# Altium PCB PulseInductionDriver.PcbDoc
Units mm, origin at the board's own origin, x right, y up, seen from the top; angles counter-clockwise.
Board outline 67.5 x 82.5 mm, 2 copper layers (Top Layer, Bottom Layer); 31 components, 19 nets, 72 pads, 0 vias.
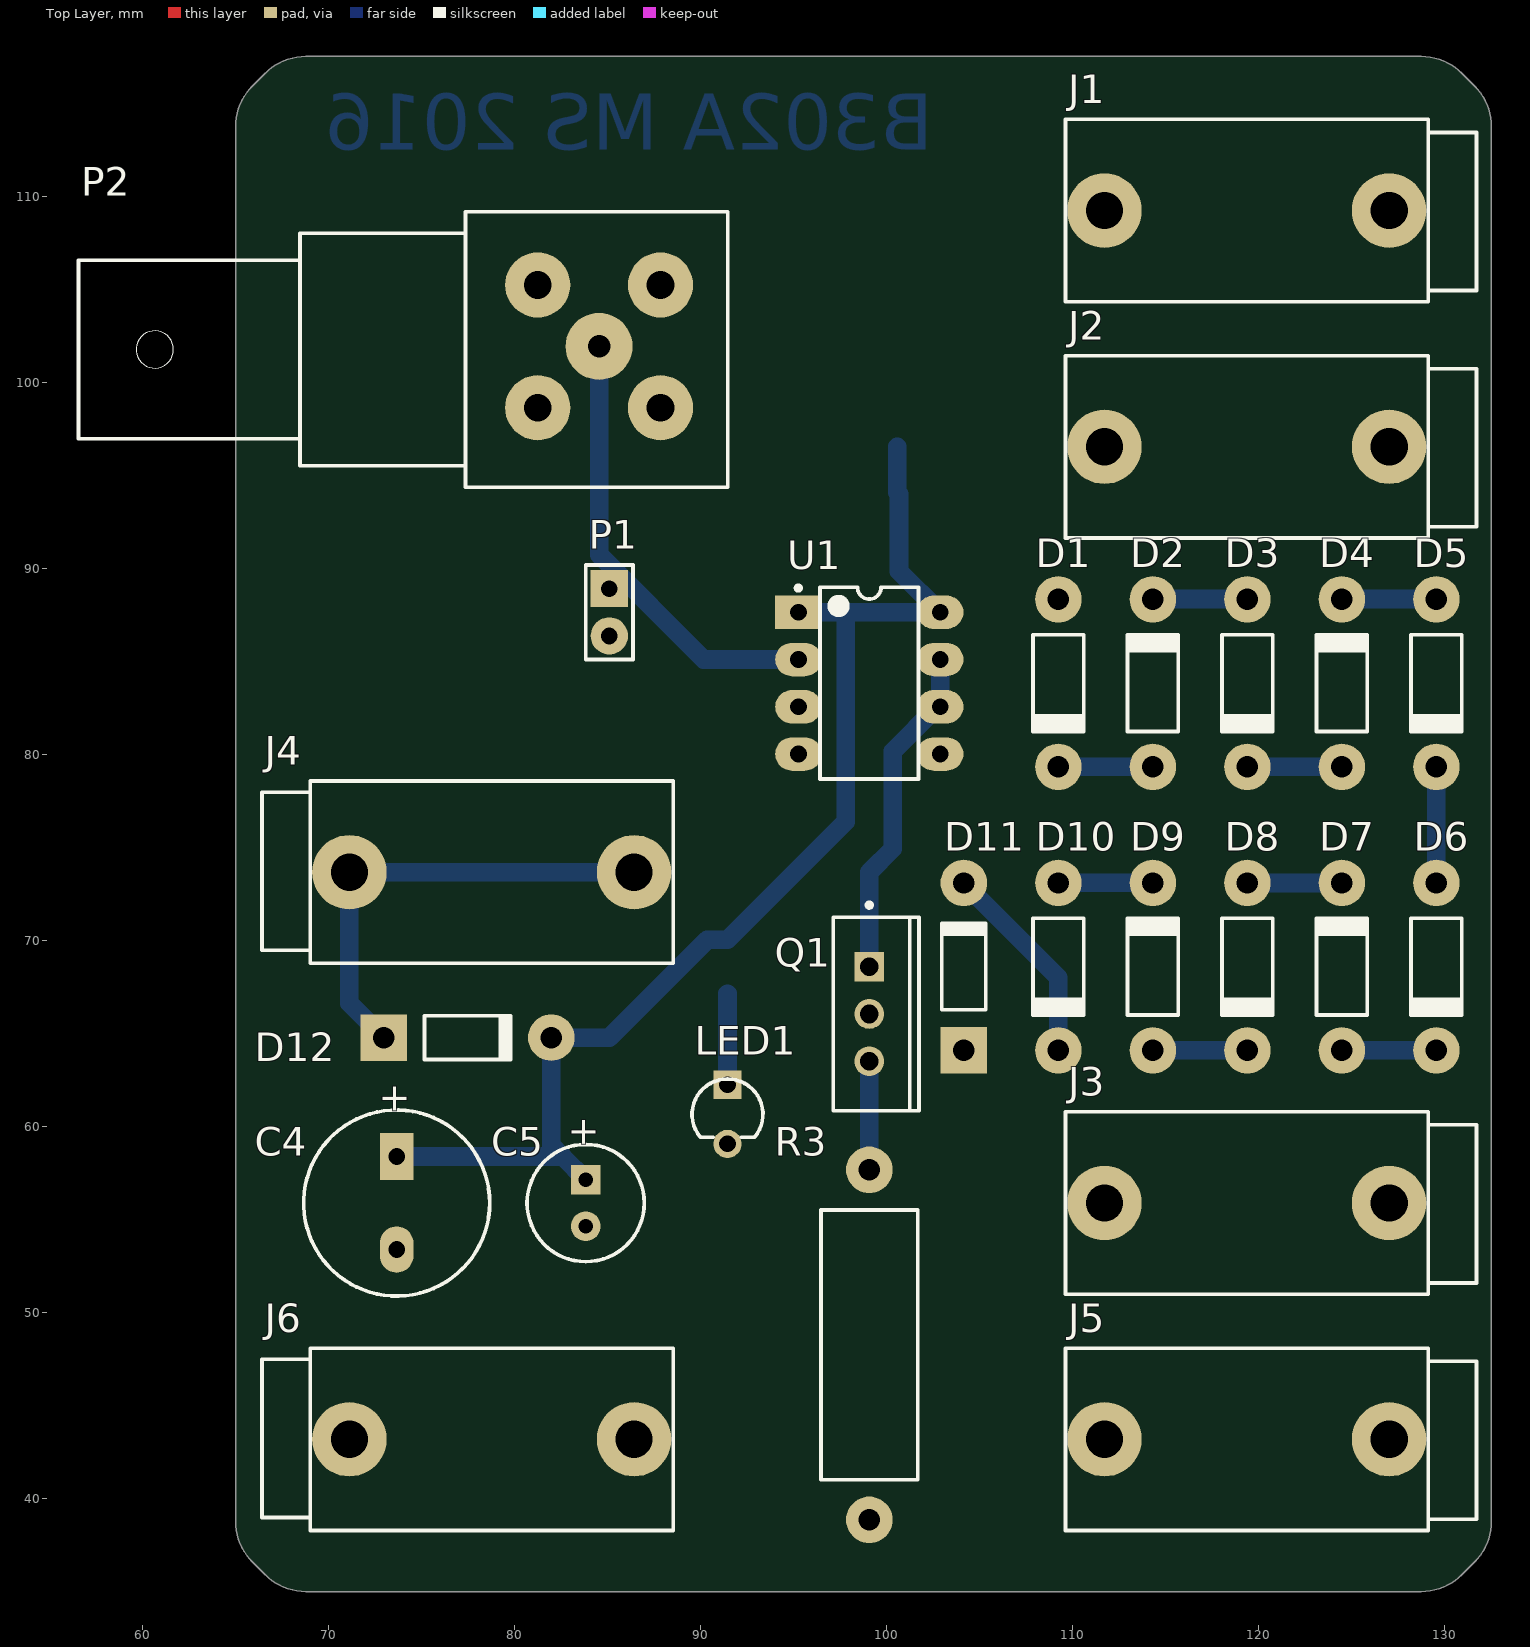
[diagram p0: Top Layer view]
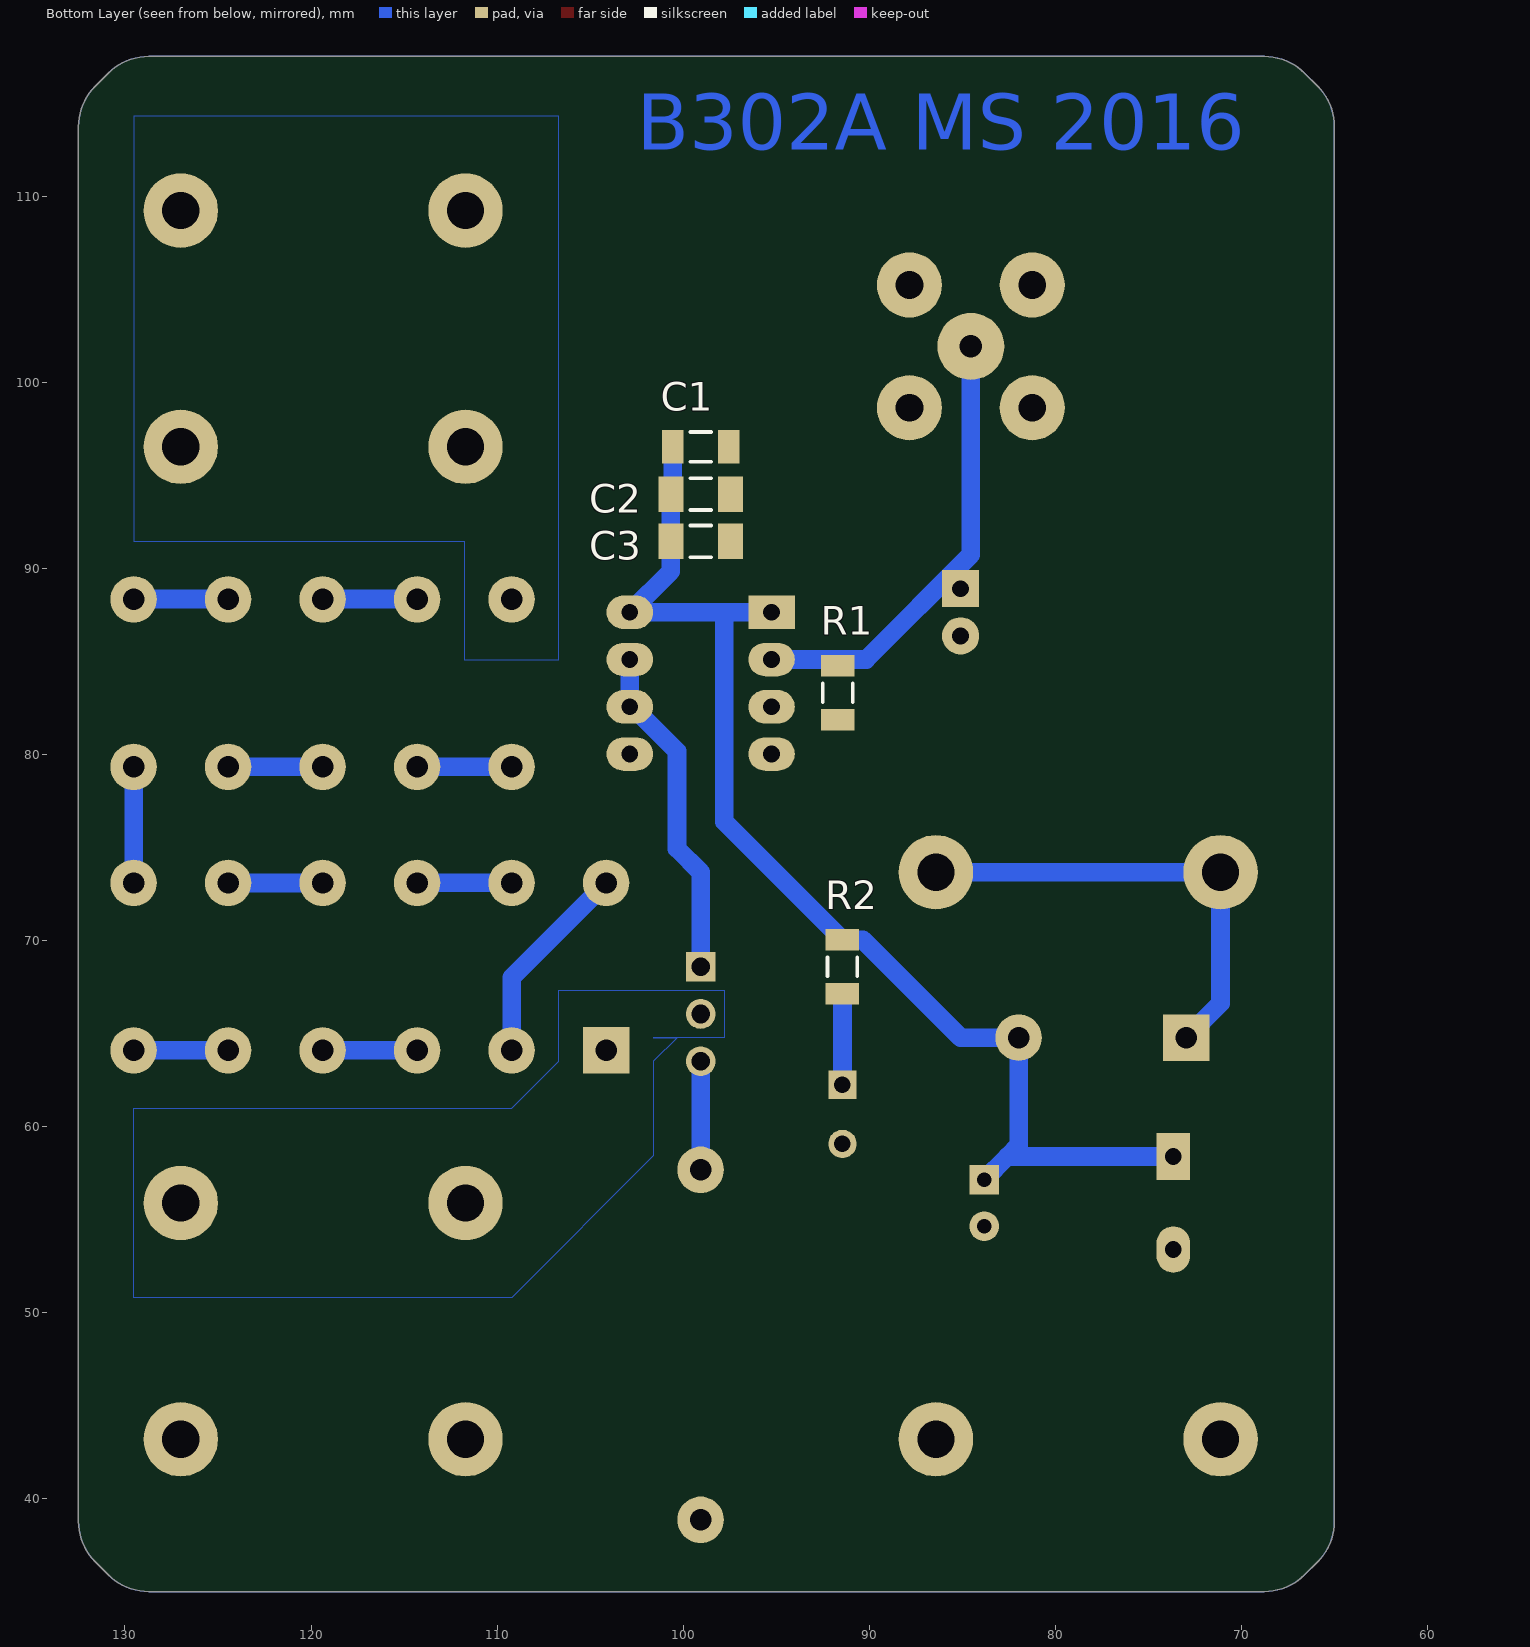
[diagram p1: Bottom Layer view, seen from below]

## Layer stack, top to bottom
Top Solder: solder mask 0.0102, Solder Resist, Dk 3.5
Top Layer: signal copper 0.0356
Dielectric 1: dielectric 0.32, FR-4, Dk 4.8
Bottom Layer: signal copper 0.0356
Bottom Solder: solder mask 0.0102, Solder Resist, Dk 3.5

## Board outline
65.898,36.602 cw(c68.066,38.77) 65,38.77 65,113.73 cw(c68.066,113.73) 65.898,115.898 66.602,116.602 cw(c68.77,114.434) 68.77,117.5 128.73,117.5 cw(c128.73,114.434) 130.898,116.602 131.602,115.898 cw(c129.434,113.73) 132.5,113.73 132.5,38.77 cw(c129.434,38.77) 131.602,36.602 130.898,35.898 cw(c128.73,38.066) 128.73,35 68.77,35 cw(c68.77,38.066) 66.602,35.898

## Design rules (kind name [scope] priority, off if disabled: settings)
Clearance "Mechanical Clearance" [InPoly vs OnLayer('Keep-Out Layer')] p1: gap=0.5
Clearance "Polygon Clearance" [InPolygon vs IsPad] p2: gap=0.3
Clearance [All] p3: gap=0.2
PolygonConnect [All] p1: connectstyle=Relief reliefconductorwidth=0.254 reliefentries=4 polygonreliefangle="90 Angle" airgapwidth=0.254
RoutingLayers [All] p1: top layer_v5=FALSE bottom layer_v5=TRUE
RoutingVias [All] p1: holewidth=0.711 width=1.27 viastyle="Through Hole" minholewidth=0.711 minwidth=1.27 maxholewidth=0.711 maxwidth=1.27
SolderMaskExpansion [All] p1: expansion=0.102
Width [All] p1: maxlimit=5 minlimit=0.5 preferedwidth=1 minimp=50.000000 maximp=50.000000 favimp=50.000000
29 further rules are at their usual default settings.

## Components (designator, comment, footprint, x,y, rotation, side; value= is the part's Value field where it differs from the comment)
C1 "4.7uF" CAPC1206(3216)190_N 99.06,96.52 r180 bottom
C2 "100nF" CAPC1206(3216)150_M 99.06,93.98 r180 bottom
C3 "100nF" CAPC1206(3216)150_M 99.06,91.44 r180 bottom
C4 "Cap Polarised" CAPPR5-10X12.5 73.66,55.88 r270 top
C5 "ECA-1HM470" PNSC-ECA-1HM470 83.82,55.88 r270 top
D1 "1N4732A" FAIR-DO-41-2_V 109.22,83.82 r270 top
D2 "1N4732A" FAIR-DO-41-2_V 114.3,83.82 r90 top
D3 "1N4732A" FAIR-DO-41-2_V 119.38,83.82 r270 top
D4 "1N4732A" FAIR-DO-41-2_V 124.46,83.82 r90 top
D5 "1N4732A" FAIR-DO-41-2_V 129.54,83.82 r270 top
D6 "1N4732A" FAIR-DO-41-2_V 129.54,68.58 r270 top
D7 "1N4732A" FAIR-DO-41-2_V 124.46,68.58 r90 top
D8 "1N4732A" FAIR-DO-41-2_V 119.38,68.58 r270 top
D9 "1N4732A" FAIR-DO-41-2_V 114.3,68.58 r90 top
D10 "1N4732A" FAIR-DO-41-2_V 109.22,68.58 r270 top
D11 "1N4002-T" DIOD-DO-41-P-2_V 104.14,68.58 r90 top
D12 "1N4002-T" DIOD-DO-41-P-2_V 77.47,64.77 r0 top
J1 "Red" "4mm socket right angled" 127,109.22 r0 top
J2 "Blue" "4mm socket right angled" 127,96.52 r0 top
J3 "Blue" "4mm socket right angled" 127,55.88 r0 top
J4 "Red" "4mm socket right angled" 71.12,73.66 r180 top
J5 "Black" "4mm socket right angled" 127,43.18 r0 top
J6 "Black" "4mm socket right angled" 71.12,43.18 r180 top
LED1 "LED_3mm" "LED-Polarized - 3mm" 91.44,62.23 r270 top
P1 "Header 2" HDR1X2 85.09,88.9 r270 top
P2 "PCB BNC" "PCB BNC RA Socket" 91.44,109.22 r0 top
Q1 "IPP110N20N3 G" INF-PG-TO220-3-1_A_V 99.06,66.04 r0 top
R1 "1K 5% 1206(3216)" RESC1206(3216)_N 91.694,83.312 r90 bottom
R2 "3K3 5% 1206(3216)" RESC1206(3216)_N 91.44,68.58 r90 bottom
R3 "13FR025E" OMTE-13FR025E 99.06,48.26 r90 top
U1 "TC4451VPA" PDIP300-PA8 99.06,83.82 r0 top

## Footprints (in the part's own frame and the unit in brackets; to place one, negate y for a bottom-side part, rotate by r counter-clockwise, add the part's x,y. Pads: shape width x height; smd on the part's side, far side on the other; paste and mask are expansions set on the pad)
"4mm socket right angled" [mm]
  round 4 hole 2: 1(-15.3,0) 1(0,0)
  silkscreen extent -17.4,-4.9 4.7,4.9
CAPC1206(3216)150_M [mm] "Chip Capacitor, Body 3.2x1.6mm, Height 1.5mm, IPC Low Density"
  rect 1.35x1.9 smd: 1(-1.6,0) 2(1.6,0)
  silkscreen extent -0.55,-0.85 0.55,0.85, body extent -1.7,-0.9 1.7,0.9, height 1.5
CAPC1206(3216)190_N [mm] "Chip Capacitor, Body 3.2x1.6mm, Height 1.9mm, IPC Medium Density"
  rect 1.15x1.8 smd: 1(-1.5,0) 2(1.5,0)
  silkscreen extent -0.55,-0.8 0.55,0.8, body extent -1.7,-0.9 1.7,0.9, height 1.9
CAPPR5-10X12.5 [mm] "Capacitor, Electrolytic, Radial; Body 10 x 12.5 mm (Dia.xH typ); Pin Spacing 5 mm (typ)"
  rect 2.5x1.8 hole 0.9: 1(-2.5,0)
  oval 2.5x1.8 hole 0.9: 2(2.5,0)
  silkscreen extent -5,-5 5,5
DIOD-DO-41-P-2_V [mm] "2-Leads, Axial Lead, Body 4.635x2.36mm, Pin Spacing 9mm"
  rect 2.5x2.5 hole 1.15: 1(-4.5,0)
  round 2.5 hole 1.15: 2(4.5,0)
  silkscreen extent -2.32,-1.18 2.32,1.18, body extent -4.93,-1.18 4.93,1.18, height 2.35
FAIR-DO-41-2_V [mm] "2-Leads, Axial leaded, Body 2.72x5.2mm, Pin Spacing 9mm"
  round 2.5 hole 1.15: 1(-4.5,0) 2(4.5,0)
  silkscreen extent -2.6,-1.36 2.6,1.36, body extent -4.93,-1.36 4.93,1.36, height 2.71
HDR1X2 [mm] "Connector; Header; 2 Position"
  rect 2x2 hole 0.9: 1(0,0)
  round 2 hole 0.9: 2(2.54,0)
  silkscreen extent -1.27,-1.27 3.81,1.27
INF-PG-TO220-3-1_A_V [mm] "FM, 3-Leads, Body 10.03x8.98mm, Pitch 2.54mm"
  rect 1.6x1.6 hole 1: 1(0,2.54)
  round 1.6 hole 1: 2(0,0) 3(0,-2.54)
  silkscreen extent -1.93,-5.2 2.67,5.97, body extent -1.93,-5.2 2.67,5.2, height 20.75
"LED-Polarized - 3mm" [mil]
  rect 60x60 hole 35: A(0,0)
  round 60 hole 35: K(125,0)
  silkscreen extent -12,-75 111,75
OMTE-13FR025E [mm]
  round 2.5 hole 1.15: 1(-9.405,0) 2(9.405,0)
  silkscreen extent -7.25,-2.6 7.25,2.6, body extent -7.25,-2.6 7.25,2.6, height 5.2
"PCB BNC RA Socket" [mm] "PCB BNC RA Socket"
  round 3.6 hole 1.2: 1(-6.9,-7.3)
  round 3.5 hole 1.5: 2(-10.2,-10.6) 2(-10.2,-4) 2(-3.6,-10.6) 2(-3.6,-4)
  silkscreen extent -34.88,-14.87 0.02,-0.07
PDIP300-PA8 [mm] "DIP, 8-Pin, Row Spacing 7.62 mm, Pitch 2.54 mm"
  rect 2.5x1.8 hole 0.9: 1(-3.81,3.81)
  oval 2.5x1.8 hole 0.9: 2(-3.81,1.27) 3(-3.81,-1.27) 4(-3.81,-3.81) 5(3.81,-3.81) 6(3.81,-1.27) 7(3.81,1.27) 8(3.81,3.81)
  silkscreen extent -3.93,-5.15 2.65,5.23, body extent -3.6,-5.15 3.6,5.15, height 5.33
PNSC-ECA-1HM470 [mm]
  rect 1.6x1.6 hole 0.8: 1(-1.25,0)
  round 1.6 hole 0.8: 2(1.25,0)
  silkscreen extent -3.15,-3.15 3.15,3.15, body extent -3.16,-3.16 3.16,3.16, height 12.2
RESC1206(3216)_N [mm] "Chip Resistor, Body 3.2x1.6mm, IPC Medium Density"
  rect 1.15x1.8 smd: 1(-1.45,0) 2(1.45,0)
  silkscreen extent -0.5,-0.8 0.5,0.8, body extent -1.67,-0.87 1.67,0.87, height 0.75

## Part data
C1: library part CMP-1037-04923-1, "CAP 4.7uF 50V ±10% 1206 (3216 Metric) Thickness 1.9mm SMD"
C2 C3: library part CMP-1037-04216-1, "CAP 100nF 100V ±20% 1206 (3216 Metric) Thickness 1.45mm SMD"
C5: library part CMP-1665-00013-1, "CAP ALUM 47UF 50V 20% RADIAL"
D1 D2 D3 D4 D5 D6 D7 D8 D9 D10: library part CMP-0892-00030-1, "Zener Diode, 4.7V, 1W, 5%, -65 to 200 degC, 2-Pin DO-41, Body 2.72 x 5.2 mm, RoHS"
D11 D12: library part CMP-0639-00002-2, "1.0 A Rectifier, 15 pF, 100 V, -65 to 150 degC, 2-Pin DO-41 Plastic, RoHS, Tape and Reel"
J1 J4: library part "4mm pcb socket r/a red"
J2 J3: library part "4mm pcb socket r/a blue"
J5 J6: library part "4mm pcb socket r/a black"
LED1: "3mm LED"
P1: "Header, 2-Pin"
P2: "PCB RA BNC Socket"
Q1: library part CMP-1091-00081-1, "N-Channel OptiMOS 3 Power-Transistor, 200 V VDS, 88 A ID, -55 to 175 degC, PG-TO220-3-1, Tube, Green"
R1: library part CMP-1014-00074-1, "1K 0.25W 5% 1206 (3216 Metric)  SMD"
R2: library part CMP-1014-00086-1, "3K3 0.25W 5% 1206 (3216 Metric)  SMD"
R3: library part CMP-1678-00001-4, "RES CURRENT SENSE .025 OHM 3W"
U1: library part CMP-0137-00054-1, "12A High-Speed MOSFET Drivers, Inverting, Extended Temperature"

## Nets (pads, with @x,y where several pads share a name; then routed paths per layer and width w, separated by ;. In a path a pad name is that pad's centre, name@x,y a point inside that pad or via, vN(x,y) a via of type N, cw(c..) or ccw(c..) an arc to the next point about the centre after c; other vN are vias at no path point)
+12V: C1.1 C2.1 C3.1 C4.1 C5.1 D12.2 R2.2 U1.1 U1.8 | length 67
  Bottom Layer w1: C4.1 82.57,58.38 ; C5.1 82.57,58.38 ; U1.1@95.02,87.86 U1.1 97.79,87.63 ; C1.1 100.56,94.08 C2.1 C3.1 100.66,89.84 U1.8 97.79,87.63 ; 82.57,58.38 81.97,58.98 D12.2 85.09,64.77 90.35,70.03 R2.2 97.79,76.38 97.79,87.63
COIL+: D1.1 J1.1 J2.1
COIL-: D11.1 J3.1 Q1.2
GND: C1.2 C2.2 C3.2 C4.2 C5.2 J5.1 J6.1 LED1.K P1.2 P2.2 R1.1 R3.1 U1.4 U1.5
NetD1_2: D1.2 D2.1 | length 5.1
  Bottom Layer w1: D1.2 D2.1
NetD2_2: D2.2 D3.1 | length 5.1
  Bottom Layer w1: D2.2 114.321,88.341 119.359,88.341 D3.1
NetD3_2: D3.2 D4.1 | length 5.1
  Bottom Layer w1: D3.2 119.384,79.324 124.456,79.324 D4.1
NetD4_2: D4.2 D5.1 | length 5.1
  Bottom Layer w1: D4.2 124.481,88.341 129.519,88.341 D5.1
NetD5_2: D5.2 D6.1 | length 6.2
  Bottom Layer w1: D6.1 D5.2
NetD6_2: D6.2 D7.1 | length 5.1
  Bottom Layer w1: D7.1 D6.2
NetD7_2: D7.2 D8.1 | length 5.1
  Bottom Layer w1: D8.1 D7.2
NetD8_2: D8.2 D9.1 | length 5.1
  Bottom Layer w1: D9.1 114.304,64.084 119.376,64.084 D8.2
NetD9_2: D9.2 D10.1 | length 5.1
  Bottom Layer w1: D10.1 109.241,73.101 114.279,73.101 D9.2
NetD10_2: D10.2 D11.2 | length 11.1
  Bottom Layer w1: D11.2 109.22,68 D10.2
NetD12_1: D12.1 J4.1 | length 25.8
  Bottom Layer w1: D12.1 71.12,66.62 71.12,73.66 86.42,73.66 J4.1@87.05,73.03
NetLED1_A: LED1.A R2.1 | length 4.9
  Bottom Layer w1: LED1.A R2.1
NetP1_1: P1.1 P2.1 R1.2 U1.2 | length 24.2
  Bottom Layer w1: P2.1 84.54,90.72 90.17,85.09 U1.2
NetQ1_1: Q1.1 U1.6 U1.7 | length 18.2
  Bottom Layer w1: Q1.1 99.06,73.66 100.33,74.93 100.33,80.159 102.721,82.55 U1.6 U1.7
NetQ1_3: Q1.3 R3.2 | length 5.8
  Bottom Layer w1: R3.2 Q1.3
pads on no net: U1.3

## Polygon pours and split planes (outlines as drawn)
GND on Bottom Layer "GND" (solid, shelved, pour order 12): 65.898,36.602 cw(c68.066,38.77) 65,38.77 65,113.73 cw(c68.066,113.73) 65.898,115.898 66.629,116.629 cw(c68.732,114.525) 68.732,117.5 128.73,117.5 cw(c128.73,114.434) 130.898,116.602 131.602,115.898 cw(c129.434,113.73) 132.5,113.73 132.5,38.77 cw(c129.434,38.77) 131.602,36.602 130.898,35.898 cw(c128.73,38.066) 128.73,35 68.77,35 cw(c68.77,38.066) 66.602,35.898
COIL- on Bottom Layer "COIL-" (solid, shelved, pour order 10): 97.79,67.31 97.79,64.77 101.6,64.77 100.33,64.77 101.6,63.5 101.6,58.42 109.22,50.8 129.54,50.8 129.54,60.96 109.22,60.96 106.68,63.5 106.68,67.31 102.87,67.31
COIL+ on Bottom Layer "COIL+" (solid, shelved, pour order 11): 107.95,114.3 129.54,114.3 129.54,106.68 129.54,91.44 111.76,91.44 111.76,85.09 106.68,85.09 106.68,114.3 107.95,114.3

## Other copper
Bottom Layer:
  text "B302A MS 2016" at 102.5,112.5 h3

## Silkscreen, mask and mechanical layers (free items; w line width, h text height)
Mechanical 1:
  lines w0.254: 66.602,35.898 65.898,36.602 cw(c68.066,38.77) 65,38.77 65,113.73 cw(c68.066,113.73) 65.898,115.898 66.629,116.629 cw(c68.732,114.525) 68.732,117.5 128.73,117.5 cw(c128.73,114.434) 130.898,116.602 131.602,115.898 cw(c129.434,113.73) 132.5,113.73 132.5,38.77 cw(c129.434,38.77) 131.602,36.602 130.898,35.898 cw(c128.73,38.066) 128.73,35 68.77,35 cw(c68.77,38.066) 66.602,35.898

## Text inside footprints (layer, text, board x,y; h text height)
C4: Top Overlay "+" at 72.91,62.345 h1.5 r270
C5: Top Overlay "+" at 83.07,60.53 h1.5 r270